# Altium PCB PCB2.PcbDoc
Units mil, origin at the board's own origin, x right, y up, seen from the top; angles counter-clockwise.
Board outline 3115 x 1130 mil, 2 copper layers (Top Layer, Bottom Layer), stack 10.8 mil thick; 30 components, 13 nets, 66 pads, 0 vias.
Unrouted connection lines stored in the file: 45.
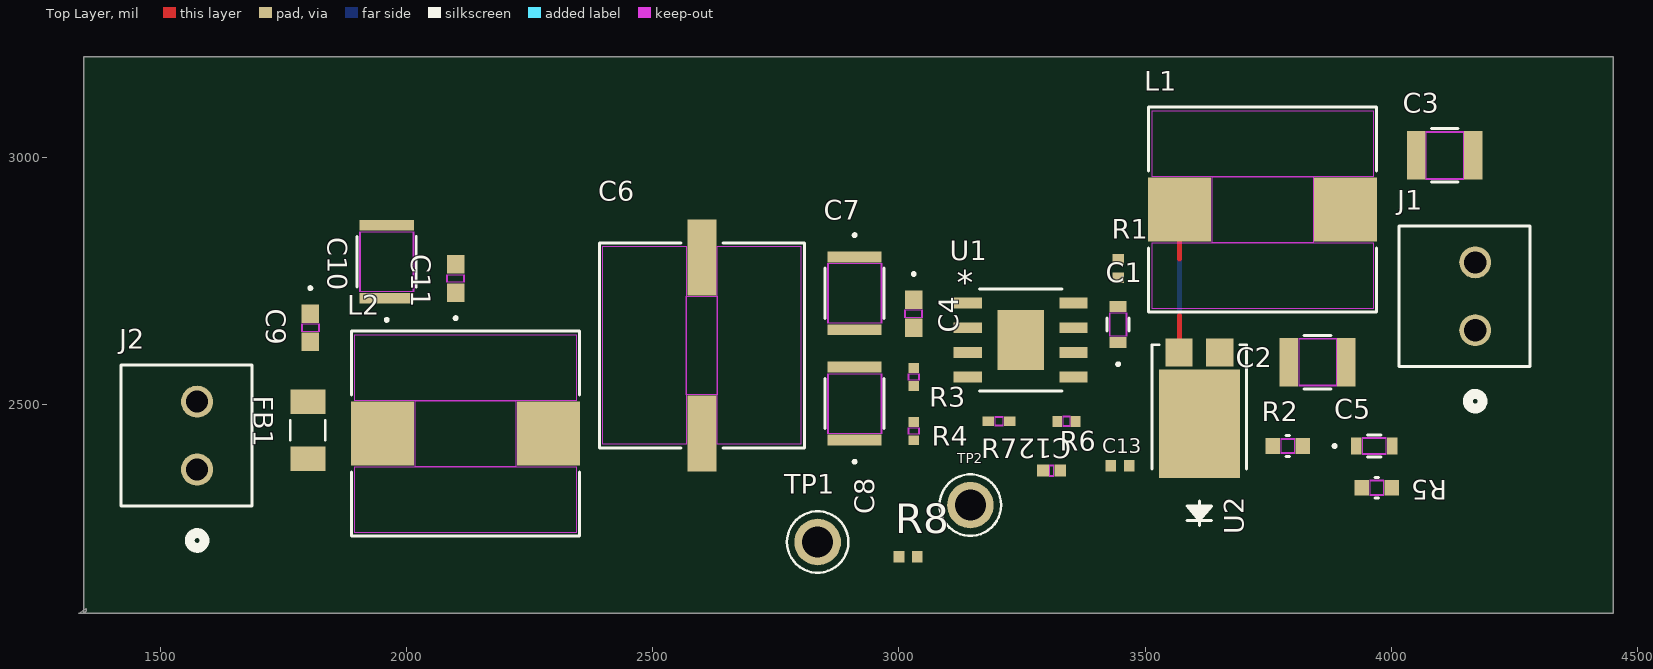
[diagram p0: Top Layer view]
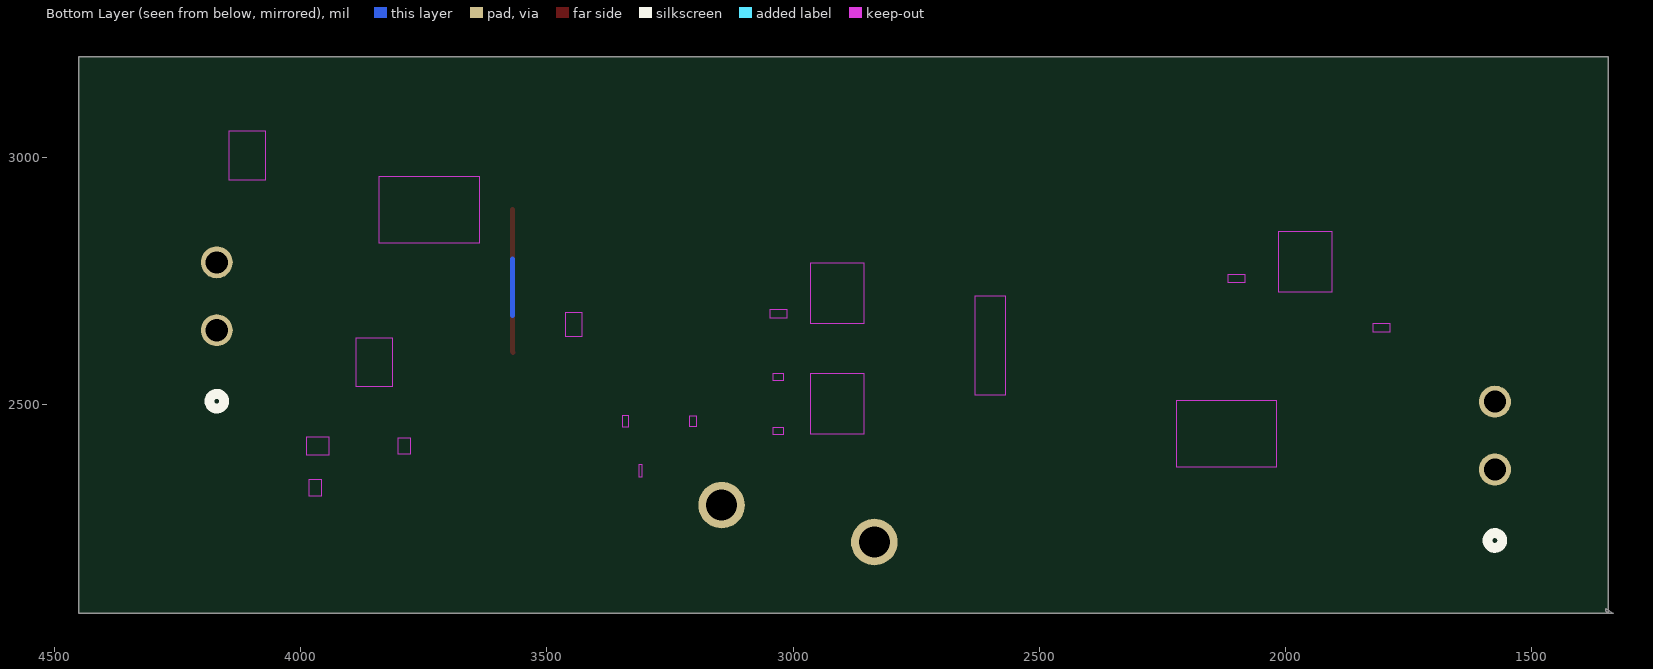
[diagram p1: Bottom Layer view, seen from below]

## Layer stack, top to bottom
Top Solder: solder mask 0.4, Solder Resist, Dk 3.5
Top Layer: signal copper 1.4
Dielectric 1: core 8, Core-025, Dk 4.6
Bottom Layer: signal copper 1.4
Bottom Solder: solder mask 0.4, Solder Resist, Dk 3.5

## Board outline
1335,2075 4450,2075 4450,3205 1345,3205 1345,2075 1350,2080 1350,2085

## Design rules (kind name [scope] priority, off if disabled: settings)
Clearance [All] p1: gap=0.3 ignorepadtopadclearanceinfootprint=FALSE
PolygonConnect [All] p1: connectstyle=Relief reliefconductorwidth=10 reliefentries=4 polygonreliefangle="90 Angle" airgapwidth=10
RoutingVias [All] p1: holewidth=28 width=50 viastyle="Through Hole" minholewidth=28 minwidth=50 maxholewidth=28 maxwidth=50
SolderMaskExpansion [All] p1: expansion=4 istentingtop=FALSE
UnRoutedNet [All] p1: checkbadconnections=TRUE
Width [All] p1: maxlimit=26 minlimit=15 preferedwidth=20 minimp=50.000000 maximp=50.000000 favimp=50.000000 checkconnectedcopper=TRUE
29 further rules are at their usual default settings.

## Components (designator, comment, footprint, x,y, rotation, side; value= is the part's Value field where it differs from the comment)
C1 "CEU3E2X7R2A332K080AE" CAP_1608_TDK 3445,2661.5 r90 top value=2.2nF
C2 "CL32B226KAJNFNE" CAP_CL32_SAM 3850,2585 r0 top value=22uF
C3 "CL32B226KAJNFNE" CAP_CL32_SAM 4108.18,3005 r180 top value=22uF
C4 "HMK107B7104KAHT" HMK107_TAY 3030,2683.65 r270 top value=0.1uF
C5 "CEU3E2X7R2A332K080AE" CAP_1608_TDK 3965,2415 r0 top value=3.3nF
C6 "EEE-FK2A330P" CAP_SMD_10P3X10P3_PAN 2600,2619 r270 top value=0.1uF
C7 "C3225X7S2A475K200AE" CAP_3225_TDK 2910,2725 r270 top value=4.7u
C8 "C3225X7S2A475K200AE" CAP_3225_TDK 2910,2501 r90 top value=4.7u
C9 "HMK107B7104KAHT" HMK107_TAY 1805,2655 r270 top value=33uF
C10 "CGA6M3X7S2A475K200AB" CAP_3225_TDK 1960,2789 r90 top value=4.7u
C11 "HMK107B7104KAHT" HMK107_TAY 2100,2755 r90 top value=4.7u
C12 "04025A560KAT2A" CAP_0402C_AVX 3310,2365 r180 top value=0.1uF
C13 "66-000260" RESC1005X04N 3448.7,2375 r0 top value=56pF
FB1 "FBMH3216HM221NTV" BEADC3216X180N 1800,2447.09 r270 top value="220 @ 100MHz"
J1 "ED555/2DS" CONN_ED5552DS_OST 4170,2650 r90 top
J2 "ED555/2DS" CONN_ED5552DS_OST 1575,2367.2 r90 top
L1 "74437368220" IND_1040-WE-LHMI_WRE 3738.5,2895 r180 top value=22uH
L2 "74437368220" IND_1040-WE-LHMI_WRE 2120,2440 r180 top value=22uH
R1 "60-000402" RESC1005X04N 3445,2775 r90 top value=0
R2 "RC0603FR-07453KL" RC0603N_YAG 3789.5,2415 r180 top value=453K
R3 "CRCW04021M00FKED" RES_CRCW_0402 3030,2555 r270 top value=1M
R4 "CRCW0402330KFKED" RES_CRCW_0402 3030,2445 r270 top value=102
R5 "RC0603FR-07453KL" RC0603N_YAG 3970,2330 r180 top value=330k
R6 "CRCW040249K9FKED" RES_CRCW_0402 3340,2465 r0 top value=453K
R7 "RC1005F104CS" RES_1005_SAM 3203.24,2465 r0 top value=49.9K
R8 "60-000508" RESC1005X04N 3018.7,2190 r0 top value=100K
TP1 "5012" TP_5012 2835,2220 r0 top
TP2 "5012" TP_5012 3145,2295 r180 top
U1 "LM5013QDDARQ1" POWERPAD8_DDA_TEX 3247.25,2630 r0 top
U2 "FSV10150V" TO277-3L_ONS 3610,2494.5 r180 top

## Footprints (in the part's own frame and the unit in brackets; to place one, negate y for a bottom-side part, rotate by r counter-clockwise, add the part's x,y. Pads: shape width x height; smd on the part's side, far side on the other; paste and mask are expansions set on the pad)
BEADC3216X180N [mm]
  rect 1.27x1.82 smd: 1(-1.471,0) 2(1.471,0)
  silkscreen extent -0.52,-0.9 0.52,0.9
CAP_0402C_AVX [mil]
  rect 24x24 smd paste+0 mask+0: 1(-17.5,0) 2(17.5,0)
  Top Layer keep-out region: -3.5,-10 -3.5,10 3.5,10 3.5,-10
  Keep-Out Layer region: -3.5,-12 -3.5,12 3.5,12 3.5,-12
  body extent -21,-12 21,12, height 22
CAP_1608_TDK [mil]
  rect 22x35 smd paste+0 mask+0: 1(-36.5,0) 2(36.5,0)
  Top Layer keep-out region: -23.5,-15.5 -23.5,15.5 23.5,15.5 23.5,-15.5
  Keep-Out Layer region: -23.5,-17.5 -23.5,17.5 23.5,17.5 23.5,-17.5
  silkscreen extent -83,-22 13,22, body extent -34,-17 34,17, height 35
CAP_3225_TDK [mil]
  rect 22x110 smd paste+0 mask+0: 1(-74,0) 2(74,0)
  Top Layer keep-out region: -61,-53 -61,53 61,53 61,-53
  Keep-Out Layer region: -61,-55 -61,55 61,55 61,-55
  silkscreen extent -121,-60 51,60, body extent -71,-55 71,55, height 49
CAP_CL32_SAM [mm]
  rect 0.956x2.5 smd paste+0 mask+0: 1(-1.478,0) 2(1.478,0)
  Top Layer keep-out region: -0.949,-1.199 -0.949,1.199 0.949,1.199 0.949,-1.199
  Keep-Out Layer region: -0.949,-1.25 -0.949,1.25 0.949,1.25 0.949,-1.25
  silkscreen extent -0.69,-1.38 0.69,1.38, body extent -1.6,-1.25 1.6,1.25, height 1
CAP_SMD_10P3X10P3_PAN [mil]
  rect 154x59 smd paste+0 mask+0: 1(-179,0) 2(179,0)
  Top Layer keep-out region: -201,-201 -201,-31.5 201,-31.5 201,-201
  Top Layer keep-out region: -201,31.5 -201,201 201,201 201,31.5
  Top Layer keep-out region: -100,-31.5 -100,31.5 100,31.5 100,-31.5
  Keep-Out Layer region: -100,-31.5 -100,31.5 100,31.5 100,-31.5
  silkscreen extent -208,-208 208,208, body extent -236,-201 236,205, height 415
CONN_ED5552DS_OST [mil]
  round 65 / inner round 60 / far side round 65 hole 45 paste-32.5 mask+0: 1(0,0) 2(137.8,0)
  silkscreen extent -159,-111 212,155
HMK107_TAY [mm]
  rect 0.956x0.9 smd paste+0 mask+0: 1(-0.728,0) 2(0.728,0)
  Top Layer keep-out region: -0.199,-0.399 -0.199,0.399 0.199,0.399 0.199,-0.399
  Keep-Out Layer region: -0.199,-0.45 -0.199,0.45 0.199,0.45 0.199,-0.45
  silkscreen extent -2.12,-0.08 -1.97,0.08, body extent -0.85,-0.45 0.85,0.45, height 0.9
IND_1040-WE-LHMI_WRE [mil]
  rect 128x130 smd paste+0 mask+0: 1(-168.5,0) 2(168.5,0)
  Top Layer keep-out region: -102.5,-67 -102.5,67 102.5,67 102.5,-67
  Top Layer keep-out region: -224.5,67 -224.5,201 224.5,201 224.5,67
  Top Layer keep-out region: -224.5,-201 -224.5,-67 224.5,-67 224.5,-201
  Keep-Out Layer region: -102.5,-67 -102.5,67 102.5,67 102.5,-67
  silkscreen extent -232,-208 232,208, body extent -226,-203 226,203, height 159
POWERPAD8_DDA_TEX [mil]
  rect 57.5x22 smd paste+0 mask+0: 1(-107.25,75) 2(-107.25,25) 3(-107.25,-25) 4(-107.25,-75) 5(107.25,-75) 6(107.25,-25) 7(107.25,25) 8(107.25,75)
  rect 94x122 smd paste-60.5 mask+0: EPAD(0,0)
  silkscreen extent -84,-104 84,104, body extent -122,-99 122,99, height 67
RC0603N_YAG [mil]
  rect 30x32 smd paste+0 mask+0: 1(-30.5,0) 2(30.5,0)
  Top Layer keep-out region: -13.5,-14 -13.5,14 13.5,14 13.5,-14
  Keep-Out Layer region: -13.5,-16 -13.5,16 13.5,16 13.5,-16
  silkscreen extent -3,-21 3,21, body extent -31,-16 31,16, height 28
RES_1005_SAM [mm]
  rect 0.606x0.5 smd paste+0 mask+0: 1(-0.553,0) 2(0.553,0)
  Top Layer keep-out region: -0.199,-0.199 -0.199,0.199 0.199,0.199 0.199,-0.199
  Keep-Out Layer region: -0.199,-0.25 -0.199,0.25 0.199,0.25 0.199,-0.25
  body extent -0.5,-0.25 0.5,0.25, height 0.4
RES_CRCW_0402 [mil]
  rect 20x22 smd paste-11 mask-11: 1(-18.5,0) 2(18.5,0)
  Top Layer keep-out region: -6.5,-9 -6.5,9 6.5,9 6.5,-9
  Keep-Out Layer region: -6.5,-11 -6.5,11 6.5,11 6.5,-11
  body extent -21,-11 21,11, height 16
RESC1005X04N [mm] "Chip Resistor, 2-Leads, Body 1.00x0.50mm, IPC Medium Density"
  rect 0.55x0.58 smd: 1(-0.475,0) 2(0.475,0)
  body extent -0.5,-0.25 0.5,0.25, height 0.35
TO277-3L_ONS [mil]
  rect 165x221 smd paste+0 mask+0: 1(0,34.5)
  rect 55x57 smd paste+0 mask+0: 2(-41.34,-110.5) 3(41.34,-110.5)
  silkscreen extent -96,-126 96,241, body extent -91,-131 91,131, height 49
TP_5012 [mm]
  round 2.4 hole 1.6: TP(0,0)
  silkscreen extent -1.59,-1.58 1.59,1.58

## Part data
C1: library part CAP-1005-2.7nF-10%-50V, "CAP CER 2.2nF 50V X7R 1005", ALT1 MFR NUMBER="Kemet, C1210C225K5RACTU", ALT2 MFR NUMBER="Vishay Vitramon, VJ0402Y272KNAAJ", Part Number=66-000203, PRI MFR NUMBER="Murata, GRM155R71H272KA01D", Rating=50V, Tolerance=10%, EE VERIFIED=YES
C2 C3: library part CAP-3225-22uFF-20%-25V, "CAP CER 22uF 20% 25V X5R 3235 (1210)", ALT1 MFR NUMBER="Kyocera, CM32X5R226M25AT", ALT2 MFR NUMBER="Venkel, C1210X7R250-226KNE-CT", Part Number=66-000233, PRI MFR NUMBER=KEMET,C1210C226M3PACTU, Rating=25V, Tolerance=20%, CREATED BY=VG, CREATED DATE="Aug 20 2021", EE VERIFIED=NO
C4 C6 C12: library part CAP-1608-0.1uF-10%-100V, "Ceramic,0.1uF, 100V,10%,X7S, 1608,SMD", Part Number=66-000086, PRI MFR NUMBER=TDK,C1608X7S2A104K, Rating=100V, Tolerance=10%, CREATED BY=Wayne, CREATED DATE="7/28/2011 5:01:26 PM", EE VERIFIED=YES, ID=24150
C5: library part CAP-1608-3300pF-10%-100V, "CAP CER 3300PF (3n3) 100V 10% X7R 1608", Part Number=66-000160, PRI MFR NUMBER="Murata, GRM188R72A332KA01D", Rating=100V, Tolerance=10%, CREATED BY=Wayne, CREATED DATE="2017-05-02 10:34:43 AM", EE VERIFIED=YES, ID=27959
C7 C8 C10 C11: library part CAP-3225-4.7uF-10%-100V, "CAP 3225 X7R 100V 4.7UF 10% 2.50", ALT1 MFR NUMBER=12101C475KAT2A, ALT2 MFR NUMBER=CL32B475KCIZNWE, Part Number=66-000252, PRI MFR NUMBER=CNC6P1X7R2A475K250AE, Rating=100V, Tolerance=10%, CREATED BY="Akshat Doctor", CREATED DATE=09/08/2022, EE VERIFIED=YES
C9: library part CAP-100127-33uF-20%-100V, "CAP POLY 33UF 40mOhm 100V 20% SMD", ALT1 MFR NUMBER="Wurth, 875575961005", Part Number=660-000305, PRI MFR NUMBER="Wurth, 875585961005", Rating=100V, Tolerance=20%, CREATED BY=VG, CREATED DATE=2023-09-05, EE VERIFIED=NO, ID=0
C13: library part CAP-1005-47pF-5%-50V, "CAP CER 56pF 50V C0G 1005", ALT1 MFR NUMBER="Walsin, 0402N470J500CT", ALT2 MFR NUMBER="Murata, CAP CER 47PF 50V C0G/NP0 0402", PRI MFR NUMBER="Samsung, CL05C470JB5NNNC", Rating=50V, Tolerance=5%, CREATED BY="Vlad Geyts", CREATED DATE=11/17/2022, EE VERIFIED=YES, Part Number=66-000260
FB1: library part FB-1206-220-4A-FBMH3216HM221NTV, "FERRITE CHIP 220 OHM 4A 1206", Part Number=58-000026, PRI MFR NUMBER="TDK, MMZ2012Y202B or Equiv", Rating=4A, Tolerance=NA, CREATED BY=Wayne, CREATED DATE="4/16/2012 5:35:12 PM", EE VERIFIED=YES, ID=24749
J1 J2: library part ED5552DS_1, "Terminal Block, 3.5mm, 2x1", Mfr_Name="On Shore Technology", Copyright="Copyright (C) 2023 Ultra Librarian. All rights reserved.", Digi-Key_Part_Number_1=ED1514-ND, Digi-Key_Part_Number_2=ED1514-NDL, Manufacturer_Part_Number=ED555/2DS, RefDes=RefDes, Type=DEV
L1 L2: library part IND-7373-270uH-20%-0.43A, "SHIELDED FIXED IND 22uH 3.5A 74mohm SM", ALT1 MFR NUMBER=7447779270, Part Number=58-000127, PRI MFR NUMBER=744777270, Rating=3.5A, Tolerance=20%, CREATED BY="Akshat Doctor", CREATED DATE=09/06/2022, EE VERIFIED=NO
R1: library part RES-1005-49.9K-1%-55V-1/16W, "0, 1%, 1005, SMD", ALT1 MFR NUMBER="Bourns, CR0402-FX-4992GLF", ALT2 MFR NUMBER="YAGEO, RC0402FR-0749K9L", PRI MFR NUMBER="Vishay Dale, CRCW040249K9FKED", Rating=1/16W, Tolerance=1%, CREATED BY=VG, CREATED DATE="Aug 10 2021", EE VERIFIED=NO, Part Number=60-000402
R2: library part RES-1608-475K-1%-200V-1/10W, "475K, 1%, 1608, SMD", ALT1 MFR NUMBER="Panasonic, ERJ-3EKF4753", ALT2 MFR NUMBER="Rohm, MCR03EZPFX4753", Part Number=60-000071, PRI MFR NUMBER="Venkel, CR0603-10W-4753FT", Rating=1/10W, Tolerance=1%, CREATED BY=Wayne, EE VERIFIED=YES, ID=7081
R3: library part RES-1005-1M-1%-50V-1/16W, "1M, 1%, 1005, SMD", ALT1 MFR NUMBER="Panasonic, ERJ-2RKF1004X", ALT2 MFR NUMBER="Samsung, RC1005F105CS", Part Number=60-000346, PRI MFR NUMBER="Vishay, CRCW04021M00FKED", Rating=1/16W, Tolerance=1%, CREATED BY=VG, EE VERIFIED=YES
R4: library part RES-1005-1M-1%-50V-1/16W, "102 ohm, 1%, 1005, SMD", ALT1 MFR NUMBER="Panasonic, ERJ-2RKF1004X", ALT2 MFR NUMBER="Samsung, RC1005F105CS", Part Number=60-000346, PRI MFR NUMBER="Vishay, CRCW04021M00FKED", Rating=1/16W, Tolerance=1%, CREATED BY=VG, EE VERIFIED=YES
R5: library part RES-1005-1M-1%-50V-1/16W, "330k, 1%, 1005, SMD", ALT1 MFR NUMBER="Panasonic, ERJ-2RKF1004X", ALT2 MFR NUMBER="Samsung, RC1005F105CS", Part Number=60-000346, PRI MFR NUMBER="Vishay, CRCW04021M00FKED", Rating=1/16W, Tolerance=1%, CREATED BY=VG, EE VERIFIED=YES
R6: library part RES-1608-475K-1%-200V-1/10W, "453K, 1%, 1608, SMD", ALT1 MFR NUMBER="Panasonic, ERJ-3EKF4753", ALT2 MFR NUMBER="Rohm, MCR03EZPFX4753", Part Number=60-000071, PRI MFR NUMBER="Venkel, CR0603-10W-4753FT", Rating=1/10W, Tolerance=1%, CREATED BY=Wayne, EE VERIFIED=YES, ID=7081
R7: library part RES-1005-475K-1%-50V-1/16W, "49.9K, 1%, 1005, SMD", ALT1 MFR NUMBER="Stackpole, RMCF0402FT475K", ALT2 MFR NUMBER="Bourns, CR0402-FX-4753GLF", Part Number=60-000508, PRI MFR NUMBER="YAGEO, RC0402FR-07475KL", Rating=1/16W, Tolerance=1%, CREATED BY="Vlad  Geyts", CREATED DATE=10/25/2022, EE VERIFIED=YES
R8: library part RES-1005-475K-1%-50V-1/16W, "100K, 1%, 1005, SMD", ALT1 MFR NUMBER="Stackpole, RMCF0402FT475K", ALT2 MFR NUMBER="Bourns, CR0402-FX-4753GLF", PRI MFR NUMBER="YAGEO, RC0402FR-07475KL", Rating=1/16W, Tolerance=1%, CREATED BY="Vlad  Geyts", CREATED DATE=10/25/2022, EE VERIFIED=YES, Part Number=60-000508
TP1 TP2: Package=None, Availability=Unavailable, MP=5012, Price=None
U1: "U_LM5013_100V_Buck_Converter", Mfr_Name="Texas Instruments", Copyright="Copyright (C) 2023 Ultra Librarian. All rights reserved.", Manufacturer_Part_Number=LM5013QDDARQ1, RefDes=RefDes, Type=DEV
U2: library part FSV10150V_1, "Schottkey Diode, 150V, 10A, 3-Pin", Mfr_Name=onsemi, Copyright="Copyright (C) 2023 Ultra Librarian. All rights reserved.", Digi-Key_Part_Number_1=2156-FSV10150V-ND, Digi-Key_Part_Number_2=2156-FSV10150V-OS-ND, Digi-Key_Part_Number_3=FSV10150VCT-ND, Digi-Key_Part_Number_4=FSV10150VDKR-ND, Digi-Key_Part_Number_5=FSV10150VTR-ND, Manufacturer_Part_Number=FSV10150V, RefDes=RefDes, Type=DEV

## Nets (pads, with @x,y where several pads share a name; then routed paths per layer and width w, separated by ;. In a path a pad name is that pad's centre, name@x,y a point inside that pad or via, vN(x,y) a via of type N, cw(c..) or ccw(c..) an arc to the next point about the centre after c; other vN are vias at no path point)
GND: C2.1 C3.1 C4.1 C12.2 J1.2 J2.1 R4.2 R5.2 R7.2 U1.1 U1.4 U2.1 U2.2
NetC1_1: C1.1 U1.7
NetC1_2: C1.2 R1.1
NetC2_2: C2.2 C3.2 C5.2 J1.1 L1.1 R6.2
NetC4_2: C4.2 C9.1 C10.1 C11.1 L2.1 R3.1 U1.2
NetC5_1: C5.1 C13.2 R2.1
NetC6_1: C6.1 C7.1 FB1.1 J2.2
NetC8_1: C8.1 C12.1 FB1.2 L2.2
NetC13_1: C13.1 R6.1 R7.1 U1.5
NetL1_2: L1.2 R1.2 R2.2 U1.8 U2.3
NetR3_2: R3.2 R5.1 TP1.TP U1.3
NetR4_1: R4.1
PGOOD: R8.2 TP2.TP U1.6
pads on no net: C6.2 C7.2 C8.2 C9.2 C10.2 C11.2 R8.1 U1.EPAD
copper on no net: | length 290.6
  Top Layer w10: 3568.66,2605 3570,2606.34 3570,2680 ; 3570,2795 3570,2895
  Bottom Layer w10: 3570,2680 3570,2795

## Text inside footprints (layer, text, board x,y; h text height)
U1: Top Overlay "*" at 3117.5,2722 h50; Mechanical 13 "*" at 3171.25,2675.5 h50